# EAGLE board MD20A-NEW (EAGLE 9.6.2)
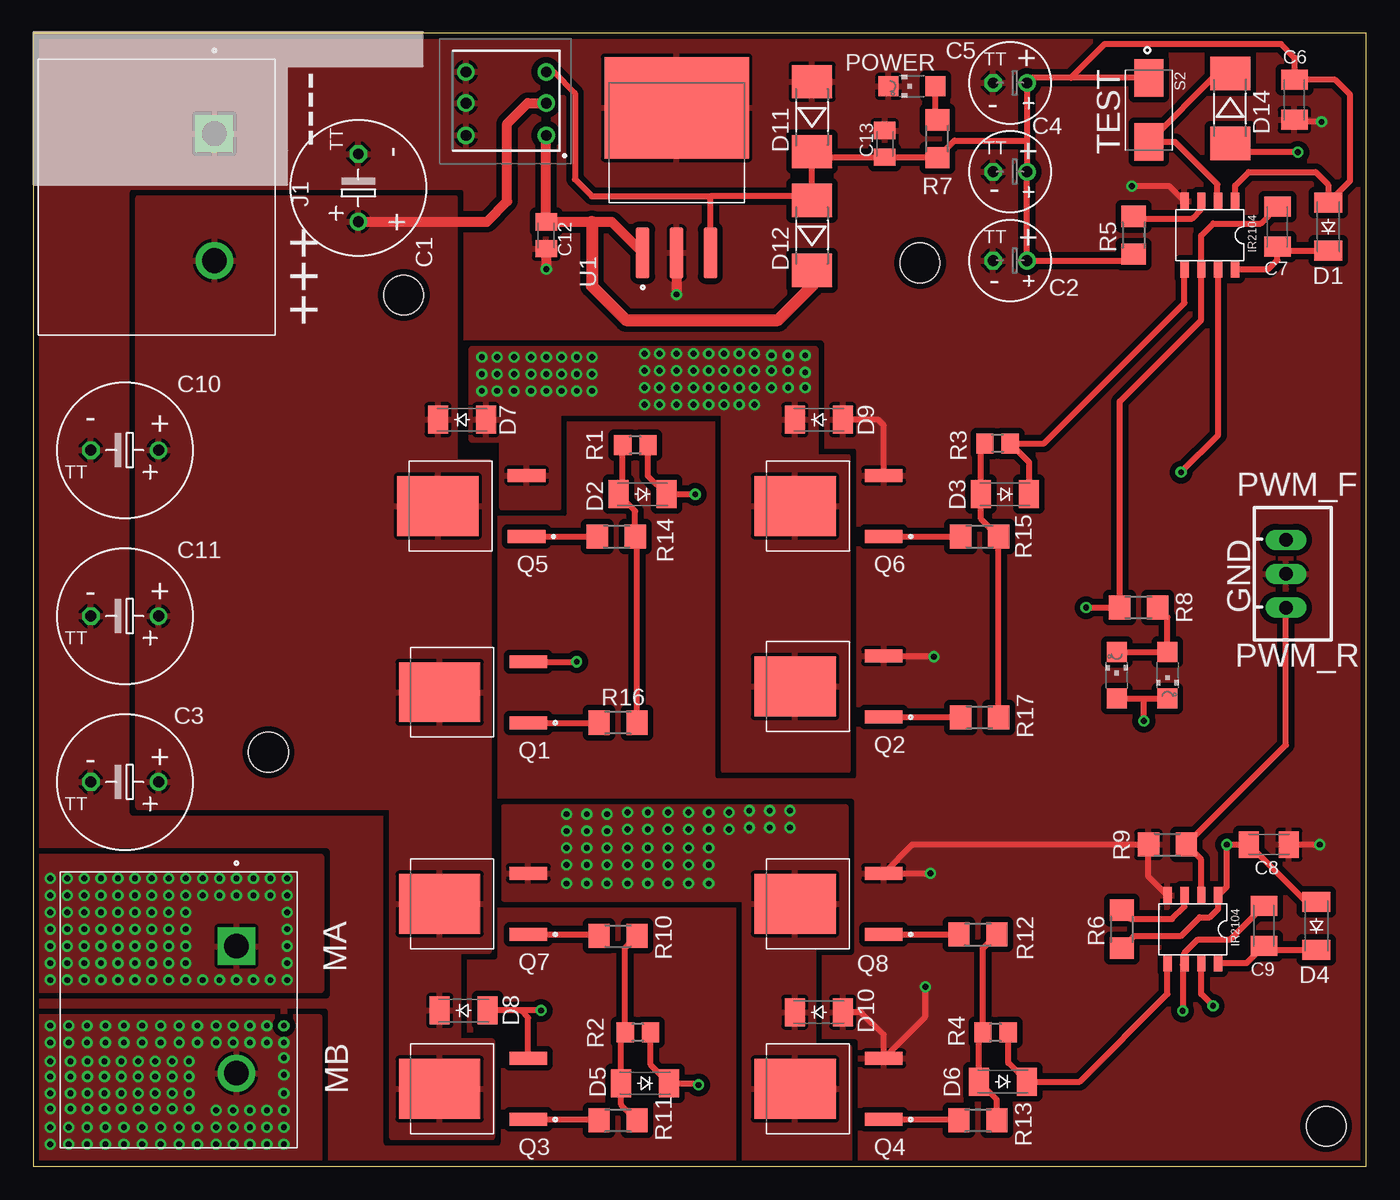
[diagram p0: board, top side]
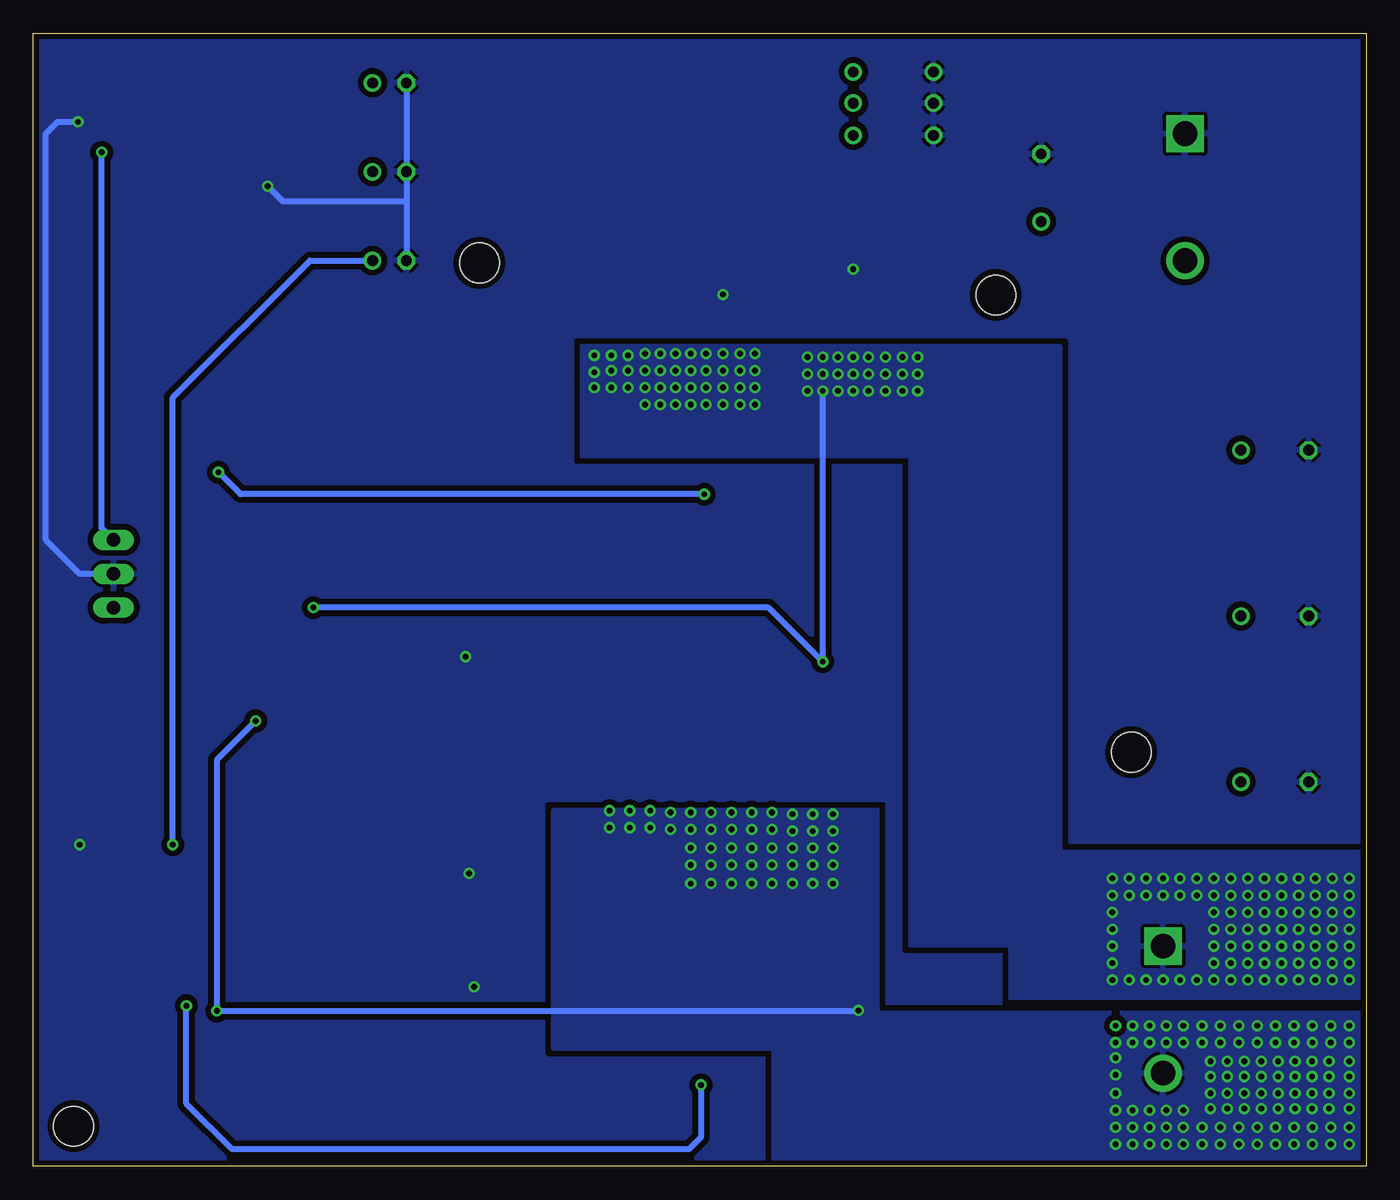
[diagram p1: board, bottom side, seen from below]

Size 100 x 85 mm. Coordinates in mm from the lower left corner, seen from the top.
Outline: 0,0 100,0 100,85 0,85 0,0
Copper layers (1*16): Top 0.035mm / dielectric 1.5mm / Bottom 0.035mm
Design rules "default *": minimum track width 17mil, minimum drill 17mil, track to track 17mil, track to pad 17mil, pad to pad 17mil, via to via 17mil, smd to smd 6mil, copper to edge 17mil, drill to drill 17mil, minimum pad ring 10mil, minimum via ring 8mil, stop-mask expansion 4mil, vias tented up to drill 0mil, thermal gap 10mil
Holes 3 mm at 97,3 66.52,67.77 27.79,65.36 17.62,31.07

## Footprints (pad centres in the part's own frame; a part is rotated, then mirrored left to right if it is on the bottom)
TT5D10 = drill 0.813: + -2.54,0 | drill 0.813 octagon: - 2.54,0
TT2D6 = drill 0.813: + -1.27,0 | drill 0.813 octagon: - 1.27,0
C1206K = smd 1.5 x 2: 1 -1.5,0; 2 1.5,0
C0805K = smd 1.3 x 1.6: 1 -1,0; 2 1,0
SOD-123_MINI-SMA = smd 1.5 x 2.1: A 1.8,0; C -1.8,0
MELF-MLL41 = smd 2.5 x 3: A 2.625,0; C -2.625,0
TE_4-1437652-6 = drill 1.854 pad 2.204 square: 1 0,0 | drill 1.854 pad 2.204: 2 9.53,0
CHIPLED_1206 = smd 1.5 x 1.5: A 0,-1.75; C 0,1.75
TO229P990X239-3_4N = smd 2.83 x 0.97: 1 -6.65,2.29; 3 -6.65,-2.29 | smd 6.1 x 4.49: 4 0,0
R0805 = smd 1.3 x 1.5: 1 -0.95,0; 2 0.95,0
R1206 = smd 1.6 x 1.803: 1 -1.422,0; 2 1.422,0
TL2230 = drill 0.8 pad 1.3: 1 -0.762,-1.016; 2 1.655,-1.016; 3 4,-1.016; 4 -0.762,5; 5 1.655,5; 6 4,5
SW_147873-2 = smd 2.8 x 2.2: 1 -2.4,0; 2 2.4,0
TO254P1524X483-4N = smd 3.79 x 0.99: 1 -6.4,2.54; 2 -6.4,0; 3 -6.4,-2.54 | smd 7.62 x 10.84: 4 4.48,0
IR2104S = smd 1.27 x 0.635: 1 0,3.81; 2 0,2.54; 3 0,1.27; 4 0,0; 5 5.08,0; 6 5.08,1.27; 7 5.08,2.54; 8 5.08,3.81
JST-XH-03-PACKAGE-LONG-PAD = drill 1.016 long: 1 -2.54,0; 2 0,0; 3 2.54,0

## Placement (x,y rotation side)
C1  100uf 53V  [TT5D10]  24.38,73.41 90 top
C2  47uf 25V  [TT2D6]  73.28,67.94 180 top
C3  330uf 50V  [TT5D10]  6.86,28.83 180 top
C4  47uf 25V  [TT2D6]  73.28,74.61 180 top
C5  47uf 25V  [TT2D6]  73.28,81.28 180 top
C6  100nf  [C1206K]  94.61,80.01 90 top
C7  1uf  [C1206K]  93.34,70.48 90 top
C8  100nf  [C1206K]  92.71,24.13 180 top
C9  1uf  [C1206K]  92.33,18.03 90 top
C10  330uf 50V  [TT5D10]  6.86,53.72 180 top
C11  330uf 50V  [TT5D10]  6.86,41.27 180 top
C12  470nf  [C0805K]  38.48,69.85 270 top
C13  10uf  [C0805K]  63.88,76.71 90 top
D1  1N5819  [SOD-123_MINI-SMA]  97.16,70.48 90 top
D2  1N4148  [SOD-123_MINI-SMA]  45.69,50.42 180 top
D3  1N4148  [SOD-123_MINI-SMA]  72.9,50.42 180 top
D4  1N5819  [SOD-123_MINI-SMA]  96.27,18.03 90 top
D5  1N4148  [SOD-123_MINI-SMA]  45.91,6.22 180 top
D6  1N4148  [SOD-123_MINI-SMA]  72.75,6.35 180 top
D7  1N5819  [SOD-123_MINI-SMA]  32.16,56.01 0 top
D8  1N5819  [SOD-123_MINI-SMA]  32.29,11.68 0 top
D9  1N5819  [SOD-123_MINI-SMA]  58.93,56.01 0 top
D10  1N5819  [SOD-123_MINI-SMA]  58.93,11.56 0 top
D11  1N4007  [MELF-MLL41]  58.42,78.74 90 top
D12  1N4007  [MELF-MLL41]  58.42,69.85 90 top
D14  1N4007  [MELF-MLL41]  89.79,79.38 270 top
J1  4-1437652-6  [TE_4-1437652-6]  13.59,77.47 270 top
J2  4-1437652-6  [TE_4-1437652-6]  15.24,16.51 270 top
LED2  REV  [CHIPLED_1206]  81.28,36.83 0 top
LED3  FOR  [CHIPLED_1206]  85.09,36.83 180 top
POWER  [CHIPLED_1206]  65.91,81.03 90 top
Q1  IRLR7843TRPBF  [TO229P990X239-3_4N]  30.48,35.56 180 top
Q2  IRLR7843TRPBF  [TO229P990X239-3_4N]  57.15,35.98 180 top
Q3  IRLR7843TRPBF  [TO229P990X239-3_4N]  30.48,5.8 180 top
Q4  IRLR7843TRPBF  [TO229P990X239-3_4N]  57.15,5.8 180 top
Q5  IRLR7843TRPBF  [TO229P990X239-3_4N]  30.35,49.53 180 top
Q6  IRLR7843TRPBF  [TO229P990X239-3_4N]  57.15,49.53 180 top
Q7  IRLR7843TRPBF  [TO229P990X239-3_4N]  30.48,19.68 180 top
Q8  IRLR7843TRPBF  [TO229P990X239-3_4N]  57.15,19.68 180 top
R1  33/27  [R0805]  45.17,54.1 180 top
R2  33/27  [R0805]  45.36,10.03 180 top
R3  33/27  [R0805]  72.35,54.23 180 top
R4  33/27  [R0805]  72.19,10.03 180 top
R5  10k  [R1206]  82.55,69.85 90 top
R6  10k  [R1206]  81.66,17.78 90 top
R7  10k  [R1206]  67.82,77.09 270 top
R8  10k  [R1206]  82.93,41.91 0 top
R9  10k  [R1206]  85.09,24.13 180 top
R10  50/100  [R1206]  43.87,17.27 180 top
R11  50/100  [R1206]  43.87,3.43 0 top
R12  50/100  [R1206]  70.87,17.4 180 top
R13  50/100  [R1206]  70.87,3.43 0 top
R14  50/100  [R1206]  43.74,47.24 180 top
R15  50/100  [R1206]  70.99,47.24 180 top
R16  50/100  [R1206]  43.87,33.27 0 top
R17  50/100  [R1206]  70.99,33.66 0 top
S1  TL2230  [TL2230]  37.47,78.11 90 top
S2  147873-2  [SW_147873-2]  83.69,79.25 270 top
U1  LM7812SX/NOPB  [TO254P1524X483-4N]  48.26,74.93 90 top
U$1  IR2104S  [IR2104S]  86.36,72.39 270 top
U$2  IR2104S  [IR2104S]  85.09,20.32 270 top
X1  JST-XH-03-PIN-LONG-PAD  [JST-XH-03-PACKAGE-LONG-PAD]  93.98,44.45 270 top

## Library data of the parts
C1-C13 = rcl; SPICEPREFIX: C
D1-D10 = diode
D11 D12 D14 = M7- diode
J1 J2 = terminal 9.52mm; AVAILABILITY: In Stock; COMMENT: 4-1437652-6; DESCRIPTION: Conn Terminal Block 2 POS 9.53mm Solder ST Thru-Hole 25A/Contact; EU_ROHS_COMPLIANCE: Compliant; MF: TE Connectivity / AMP; MP: 4-1437652-6; PACKAGE: None; PRICE: None; PURCHASE-URL: https://pricing.snapeda.com/search/part/4-1437652-6/?ref=eda
LED2 LED3 POWER = led
Q1-Q8 = IRLR7843TRPBF; AVAILABILITY: In Stock; DESCRIPTION: RoHS Compliant | Industry-leading quality | Low RDS(ON) at 4.5V VGS | Fully Characterized Avalanche Voltage and Current | Ultra-Low Gate Impedance | Logic Level; MF: Infineon Technologies; MP: IRLR7843TRPBF; PACKAGE: TO-252-3 Infineon; PRICE: None; PURCHASE-URL: https://pricing.snapeda.com/search/part/IRLR7843TRPBF/?ref=eda
R1-R17 = rcl; SPICEPREFIX: R
S1 = Latching switch-TL2230O; ARROW_PART_NUMBER: TL2230OAF100; DESCRIPTION: Tactile Switches 100mA 30VDCMomentary; HEIGHT: 12.5mm; MANUFACTURER_NAME: E-Switch; MANUFACTURER_PART_NUMBER: TL2230OAF100; MOUSER_PART_NUMBER: 612-TL2230OAF100; MOUSER_PRICE-STOCK: https://www.mouser.co.uk/ProductDetail/E-Switch/TL2230OAF100?qs=fi7yB2oewZlE2iWFXd0o2g%3D%3D
S2 = smd-Tactile-Switch; AVAILABILITY: In Stock; COMMENT: 147873-2; DESCRIPTION: Switch Tactile OFF (ON) SPST Rectangular Button J-Bend 0.05A 24VDC 1.77N SMD T/R; MF: TE Connectivity; MP: 147873-2; PACKAGE: None; PRICE: None; PURCHASE-URL: https://pricing.snapeda.com/search/part/147873-2/?ref=eda
U1 = LM7812SX_NOPB; AVAILABILITY: In Stock; DESCRIPTION: 1.5-A, 30-V, linear voltage regulator; MF: Texas Instruments; MP: LM7812SX/NOPB; PACKAGE: TO-263-3 Texas Instruments; PRICE: None; PURCHASE-URL: https://pricing.snapeda.com/search/part/LM7812SX/NOPB/?ref=eda
U$1 U$2 = IR2104S; AVAILABILITY: In Stock; DESCRIPTION: Half-Bridge Gate Driver IC Non-Inverting 8-SOIC; MF: Infineon Technologies; MP: IR2104S; PACKAGE: SO-8 Infineon; PRICE: None; PURCHASE-URL: https://pricing.snapeda.com/search/part/IR2104S/?ref=eda
X1 = JST Connectors v1-0

## Nets
12V: C2.+ C4.+ C5.+ C6.2 C8.2 C13.1 D1.A D4.A D11.C D12.A R5.1 R6.1 R7.2 S1.3 S2.1 U1.3 U$1.1 U$2.1
N$1: POWER.A R7.1
N$2: R5.2 U$1.3
N$3: C7.1 D1.C U$1.8
N$4: LED2.C LED3.A R8.2
N$5: D2.C R1.1 U$1.7
N$6: D14.A X1.1
N$7: D3.C R3.1 U$1.5
N$8: Q5.1 R14.2
N$9: C9.1 D4.C U$2.8
N$10: Q6.1 R15.2
N$11: Q1.1 R16.1
N$12: Q8.1 R12.2
N$13: D6.C R4.1 U$2.5
N$14: D5.C R2.1 U$2.7
N$15: R6.2 U$2.3
N$16: Q2.1 R17.1
N$17: Q7.1 R10.2
N$18: Q3.1 R11.1
N$20: Q4.1 R13.1
PE: C1.- C2.- C3.- C4.- C5.- C6.1 C8.1 C10.- C11.- C12.2 C13.2 D9.A D10.A D11.A J1.1 POWER.C Q2.3 Q4.3 Q6.3 Q8.3 R9.2 S1.4 S1.5 S1.6 U1.2 U1.4 U$1.4 U$2.4 X1.2
PWM_F: D14.C S2.2 U$1.2
PWM_R: R9.1 U$2.2 X1.3
Q1: D2.A R1.2 R14.1 R16.2
Q2: D3.A R3.2 R15.1 R17.2
Q3: D5.A R2.2 R10.1 R11.2
Q4: D6.A R4.2 R12.1 R13.2
V+: C12.1 D12.C S1.1 U1.1
VCC: C1.+ C3.+ C10.+ C11.+ D7.C D8.C J1.2 Q1.4 Q3.4 Q5.4 Q7.4 S1.2
VS_1: C7.2 D7.A D9.C J2.1 Q1.3 Q2.4 Q5.3 Q6.4 R8.1 U$1.6
VS_2: C9.2 D8.A D10.C J2.2 LED2.A LED3.C Q3.3 Q4.4 Q7.3 Q8.4 U$2.6

## Tracks (layer width: path | path; a pad name or v marks a point on that pad's centre or on a via)
12V  (via drill 0.43)
  Top 0.432: S1.3 39.05,82.11 40.64,80.52 40.64,74.04 41.91,72.77 50.8,72.77 | 50.8,72.77 58.12,72.77 D12.A D11.C 58.83,75.71 C13.1 67.78,75.71 R7.2 69.11,76.96 74.55,76.96 | U1.3 50.8,72.77 | 74.55,76.96 C5.+ 74.93,81.66 77.85,81.66 | 74.55,76.96 C4.+ C2.+ 82.07,67.94 R5.1 | S2.1 83.68,81.66 77.85,81.66 | 77.85,81.66 80.39,84.2 93.6,84.2 94.61,83.19 C6.2 97.69,81.51 98.81,80.39 98.81,73.94 D1.A 97.16,73.66 96.22,74.6 91.19,74.6 90.17,73.58 U$1.1 | D4.A 95.51,19.83 C8.2 v89.53,24.13 89.53,20.95 U$2.1 88.9,19.3 88.27,18.67 87.5,18.67 86.08,17.25 82.55,17.25 R6.1
  Bottom 0.432: v89.53,24.13 89.53,57.66 79.25,67.94 C2.+
N$1
  Top 0.432: R7.1 67.66,78.67 POWER.A
N$2
  Top 0.432: R5.2 82.72,71.11 86.95,71.11 87.63,71.79 U$1.3
N$3
  Top 0.432: U$1.8 92.69,67.31 93.34,67.97 C7.1 93.64,68.69 D1.C
N$4
  Top 0.432: LED2.C LED3.A 85.09,41.17 R8.2
N$5  (via drill 0.43)
  Top 0.432: R1.1 46.12,51.8 D2.C v49.66,50.42 | v86.11,52.07 88.9,54.86 U$1.7
  Bottom 0.432: v49.66,50.42 84.45,50.42 v86.11,52.07
N$6  (via drill 0.43)
  Top 0.432: v94.87,76.07 90.47,76.07 D14.A
  Bottom 0.432: X1.1 94.87,47.88 v94.87,76.07
N$7
  Top 0.432: D3.C 74.7,52.83 R3.1 75.82,54.23 86.36,64.77 U$1.5
N$8
  Top 0.432: Q5.1 R14.2
N$9
  Top 0.432: U$2.8 91.03,15.24 C9.1 92.63,16.23 D4.C
N$10
  Top 0.432: Q6.1 R15.2
N$11
  Top 0.432: Q1.1 R16.1
N$12
  Top 0.432: Q8.1 R12.2
N$13
  Top 0.432: U$2.5 85.09,12.92 78.52,6.35 D6.C 73.14,7.75 R4.1
N$14  (via drill 0.43)
  Top 0.432: R2.1 46.31,7.62 D5.C 49.78,6.22 v49.91,6.1 | v88.52,12.03 87.63,12.92 U$2.7
  Bottom 0.432: v49.91,6.1 49.91,2.16 50.8,1.27 85.09,1.27 88.52,4.7 v88.52,12.03
N$15
  Top 0.432: R6.2 82.32,18.54 85.43,18.54 86.36,19.47 U$2.3
N$16
  Top 0.432: Q2.1 69.53,33.69 R17.1
N$17
  Top 0.432: Q7.1 42.32,17.39 R10.2
N$18
  Top 0.432: Q3.1 42.36,3.51 R11.1
N$20
  Top 0.432: Q4.1 69.36,3.51 R13.1
N$27  (via drill 0.43)
  other vias: 18.8,10.54
PE  (via drill 0.43)
  Top 0.432: v96.65,78.36 94.77,78.36 C6.1 | U$1.4 85.22,73.53 v82.42,73.53 | D10.A 62.1,11.56 63.8,9.86 Q4.3 66.93,11.22 v66.93,13.46 | Q6.3 63.8,55.58 63.37,56.01 D9.A | C8.1 v96.52,24.13 | U$2.4 83.67,21.74 R9.2 65.95,24.13 Q8.3 v67.31,21.98 v67.31,21.97 | Q2.3 67.52,38.27 v67.56,38.23
  Top 0.762: C12.2 v38.48,67.31 | U1.2 v48.26,65.41
  Bottom 0.432: C5.- C4.- 72.01,72.39 | 72.01,72.39 C2.- | v82.42,73.53 81.28,72.39 72.01,72.39 | X1.2 96.52,44.45 99.06,46.99 99.06,77.47 98.17,78.36 v96.65,78.36
  pour Top: 5.97,25.4 0,25.4 0,85.09 33.91,85.09 33.91,74.68 5.97,74.68
  pour Top: 41.91,85.09 65.66,85.09 65.66,77.22 61.47,77.22 61.47,79.38 54.48,79.38 54.48,74.93 41.91,74.93
  pour Top (rank 2): 0,85.09 100.33,85.09 100.33,-1.27 -1.27,-1.27 -1.27,85.09
  pour Bottom (rank 2): -1.27,85.09 100.33,85.09 100.33,-1.27 -1.27,-1.27
PWM_F
  Top 0.432: D14.C 88.84,82 S2.2 85.67,76.85 88.85,73.67 88.85,72.44 U$1.2
PWM_R
  Top 0.432: U$2.2 87.63,23.01 R9.1 93.98,31.6 X1.3
Q1
  Top 0.432: R1.2 44.22,50.74 D2.A 45.16,49.15 R14.1 45.29,47.12 R16.2
Q2
  Top 0.432: R3.2 71.1,53.93 D3.A 71.1,48.56 R15.1 R17.2
Q3
  Top 0.432: R11.2 44.11,4.61 D5.A 44.11,9.73 R2.2 44.41,16.39 R10.1
Q4
  Top 0.432: R12.1 71.24,16.36 R4.2 70.94,9.73 D6.A 72.29,5.01 R13.2
V+
  Top 0.762: S1.1 C12.1 41.91,70.85 43.4,70.85 U1.1
  Top 0.889: 41.91,70.85 41.91,66.04 44.45,63.5 55.88,63.5 58.42,66.04 D12.C
VCC
  Top 0.762: C1.+ 34.04,70.87 35.56,72.39 35.56,78.23 37.09,79.76 S1.2
  pour Top: 7.87,26.92 7.87,72.64 31.62,72.64 31.62,52.83 34.16,52.83 34.16,16.13 31.88,16.13 31.88,9.4 34.42,9.4 34.42,2.16 26.92,2.16 26.92,26.92
VS_1  (via drill 0.43)
  Top 0.432: C7.2 92.09,70.73 88.52,70.73 87.63,69.84 U$1.6 87.63,63.5 81.51,57.38 R8.1 v78.99,41.91 | Q1.3 v40.76,37.85 v40.77,37.85
  Bottom 0.432: v78.99,41.91 44.83,41.91 v40.77,37.85 v40.77,58.17
  other vias: 8.89,16.51 7.62,16.51 6.35,16.51 5.08,16.51 3.81,16.51 2.54,16.51 1.27,16.51 1.27,17.78 2.54,17.78 3.81,17.78 5.08,17.78 6.35,17.78 7.62,17.78 8.89,17.78 10.16,17.78 11.43,17.78 10.16,16.51 11.43,16.51 11.43,15.24 10.16,15.24 8.89,15.24 7.62,15.24 6.35,15.24 5.08,15.24 3.81,15.24 2.54,15.24 1.27,15.24 1.27,13.97 2.54,13.97 3.81,13.97 5.08,13.97 6.35,13.97 7.62,13.97 8.89,13.97 10.16,13.97 11.43,13.97 12.7,13.97 13.97,13.97 15.24,13.97 16.51,13.97 17.78,13.97 19.05,13.97 19.05,15.24 19.05,19.05 11.43,19.05 10.16,19.05 8.89,19.05 7.62,19.05 6.35,19.05 5.08,19.05 3.81,19.05 2.54,19.05 1.27,19.05 1.27,20.32 1.27,21.59 2.54,21.59 2.54,20.32 3.81,21.59 3.81,20.32 5.08,21.59 5.08,20.32 6.35,21.59 6.35,20.32 7.62,21.59 7.62,20.32 8.89,21.59 8.89,20.32 10.16,21.59 10.16,20.32 11.43,21.59 11.43,20.32 12.7,21.59 12.7,20.32 13.97,21.59 13.97,20.32 15.24,21.59 15.24,20.32 16.51,21.59 16.51,20.32 17.78,21.59 17.78,20.32 19.05,21.59 19.05,20.32 19.05,17.78 19.05,16.51 45.85,59.69 45.85,58.42 45.85,60.96 46.99,58.42 48.26,58.42 49.53,58.42 50.67,58.42 50.67,59.69 50.67,60.96 51.82,60.96 51.82,59.69 51.82,58.42 52.96,60.96 52.96,59.69 52.96,58.42 54.1,60.96 54.1,59.69 54.1,58.42 48.26,60.96 49.53,60.96 46.99,60.96 46.99,59.69 48.26,59.69 49.53,59.69 33.66,59.44 33.66,60.71 38.48,59.44 38.48,60.71 39.62,60.71 39.62,59.44 40.77,60.71 40.77,59.44 41.91,60.71 41.91,59.44 36.07,60.71 37.34,60.71 34.8,60.71 34.8,59.44 36.07,59.44 37.34,59.44 33.66,58.17 38.48,58.17 39.62,58.17 41.91,58.17 34.8,58.17 36.07,58.17 37.34,58.17 45.85,57.15 46.99,57.15 48.26,57.15 49.53,57.15 50.67,57.15 51.82,57.15 52.96,57.15 54.1,57.15 55.37,60.83 56.64,60.83 57.91,60.83 55.37,59.69 56.64,59.69 57.91,59.56 55.37,58.42 56.64,58.42 57.91,58.42
  pour Top: 0,23.24 21.59,23.24 21.59,13.21 0,13.21
  pour Top: 39.37,49.4 35.18,49.4 35.18,54.48 32.89,54.48 32.89,61.34 58.67,61.34 58.67,53.21 61.09,53.21 61.09,29.72 51.82,29.72 51.82,56.52 39.37,56.52
  pour Bottom: 0,23.5 22.99,23.5 22.99,61.47 58.8,61.47 58.8,53.34 34.16,53.34 34.16,16.64 26.67,16.64 26.67,12.7 0,12.7
VS_2  (via drill 0.43)
  Top 0.432: Q3.3 37.13,11.13 36.58,11.68 D8.A v38.1,11.68 | v86.23,11.65 86.23,15.11 U$2.6 86.36,16 87.38,17.02 89.81,17.02 C9.2 | LED2.A 83.31,35.08 | 83.31,35.08 LED3.C | v83.31,33.4 83.31,35.08
  Bottom 0.432: v38.1,11.68 38.13,11.65 v86.23,11.65 86.23,30.48 v83.31,33.4
  other vias: 1.27,4.32 2.79,4.32 4.06,4.32 5.33,4.32 6.6,4.32 44.58,25.27 46.1,25.27 47.62,25.27 1.27,2.92 2.65,2.92 1.27,1.65 4.03,1.65 2.65,1.65 4.03,2.92 5.41,2.92 6.79,2.92 8.18,2.92 9.56,2.92 10.94,2.92 12.32,2.92 5.41,1.65 6.79,1.65 8.18,1.65 9.56,1.65 10.94,1.65 12.32,1.65 13.72,2.92 14.99,2.92 16.26,2.92 17.53,2.92 13.72,1.65 14.99,1.65 16.26,1.65 17.53,1.65 1.27,5.46 2.79,5.46 4.06,5.46 5.33,5.46 6.6,5.46 44.58,26.54 46.1,26.54 47.62,26.54 1.27,10.54 2.65,10.54 1.27,9.27 4.03,9.27 2.65,9.27 4.03,10.54 5.41,10.54 6.79,10.54 8.18,10.54 9.56,10.54 10.94,10.54 12.32,10.54 5.41,9.27 6.79,9.27 8.18,9.27 9.56,9.27 10.94,9.27 12.32,9.27 13.72,10.54 14.99,10.54 16.26,10.54 17.53,10.54 13.72,9.27 14.99,9.27 16.26,9.27 17.53,9.27 18.8,9.27 18.8,8.13 18.8,6.86 18.8,5.46 18.8,4.19 18.8,2.92 1.27,6.73 1.27,7.87 7.87,4.32 9.14,4.32 10.41,4.32 11.68,4.32 7.87,5.46 9.14,5.46 10.41,5.46 11.68,5.46 2.79,6.73 4.06,6.73 5.33,6.73 6.6,6.73 2.79,7.87 4.06,7.87 5.33,7.87 6.6,7.87 7.87,6.73 9.14,6.73 10.41,6.73 11.68,6.73 7.87,7.87 9.14,7.87 10.41,7.87 11.68,7.87 18.8,1.65 13.72,4.19 14.99,4.19 16.26,4.19 17.53,4.19 40.01,25.15 41.53,25.15 43.05,25.15 40.01,26.42 41.53,26.42 43.05,26.42 44.58,22.61 46.1,22.61 47.62,22.61 44.58,23.88 46.1,23.88 47.62,23.88 40.01,22.61 41.53,22.61 43.05,22.61 40.01,23.88 41.53,23.88 43.05,23.88 53.72,25.4 55.24,25.4 56.77,25.4 53.72,26.67 55.24,26.67 56.77,26.67 49.15,25.27 50.67,25.27 52.2,25.27 49.15,26.54 50.67,26.54 52.2,26.54 44.58,21.21 46.1,21.21 47.62,21.21 40.01,21.21 41.53,21.21 43.05,21.21 49.15,22.61 50.67,22.61 49.15,23.88 50.67,23.88 49.15,21.21 50.67,21.21
  pour Top: 0,11.18 0,0 21.46,0 21.46,11.18
  pour Top: 61.21,0 61.21,8.89 58.55,8.89 58.55,16.51 60.96,16.51 60.96,26.92 35.31,26.92 35.31,20.07 53.21,20.07 53.34,19.94 53.34,0
  pour Bottom: 0,11.43 36.7,11.43 36.7,26.67 60.96,26.67 60.96,8.89 44.45,8.89 44.45,0 0,0

## Text on the board
tNames: + | - | ---- | - | TEST | + | - | + | + | - | +++ | - | + | PWM_F | - | + | GND | PWM_R | - | + | MA | MB